# Altium PCB Dev_Brd_ATSAML10D16A_HandMade.PcbDoc
Units mm, origin at the board's own origin, x right, y up, seen from the top; angles counter-clockwise.
Board outline 28 x 40 mm, 2 copper layers (Top Layer, Bottom Layer); 78 components, 47 nets, 211 pads, 70 vias.
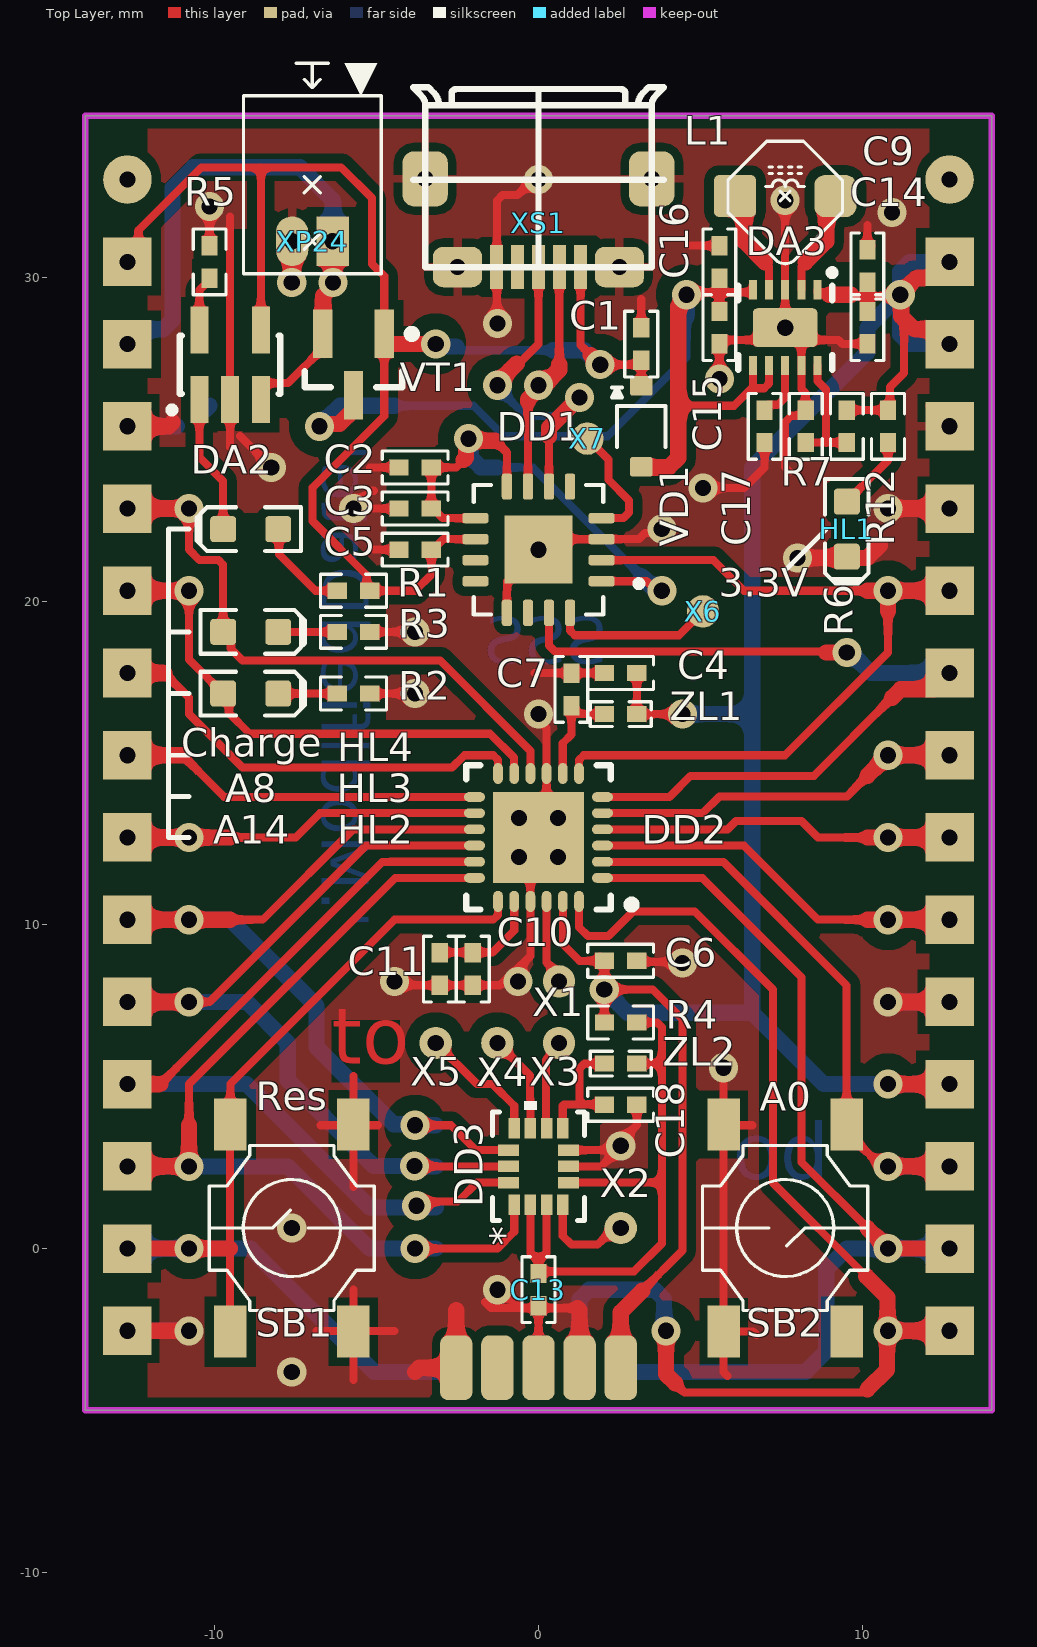
[diagram p0: Top Layer view]
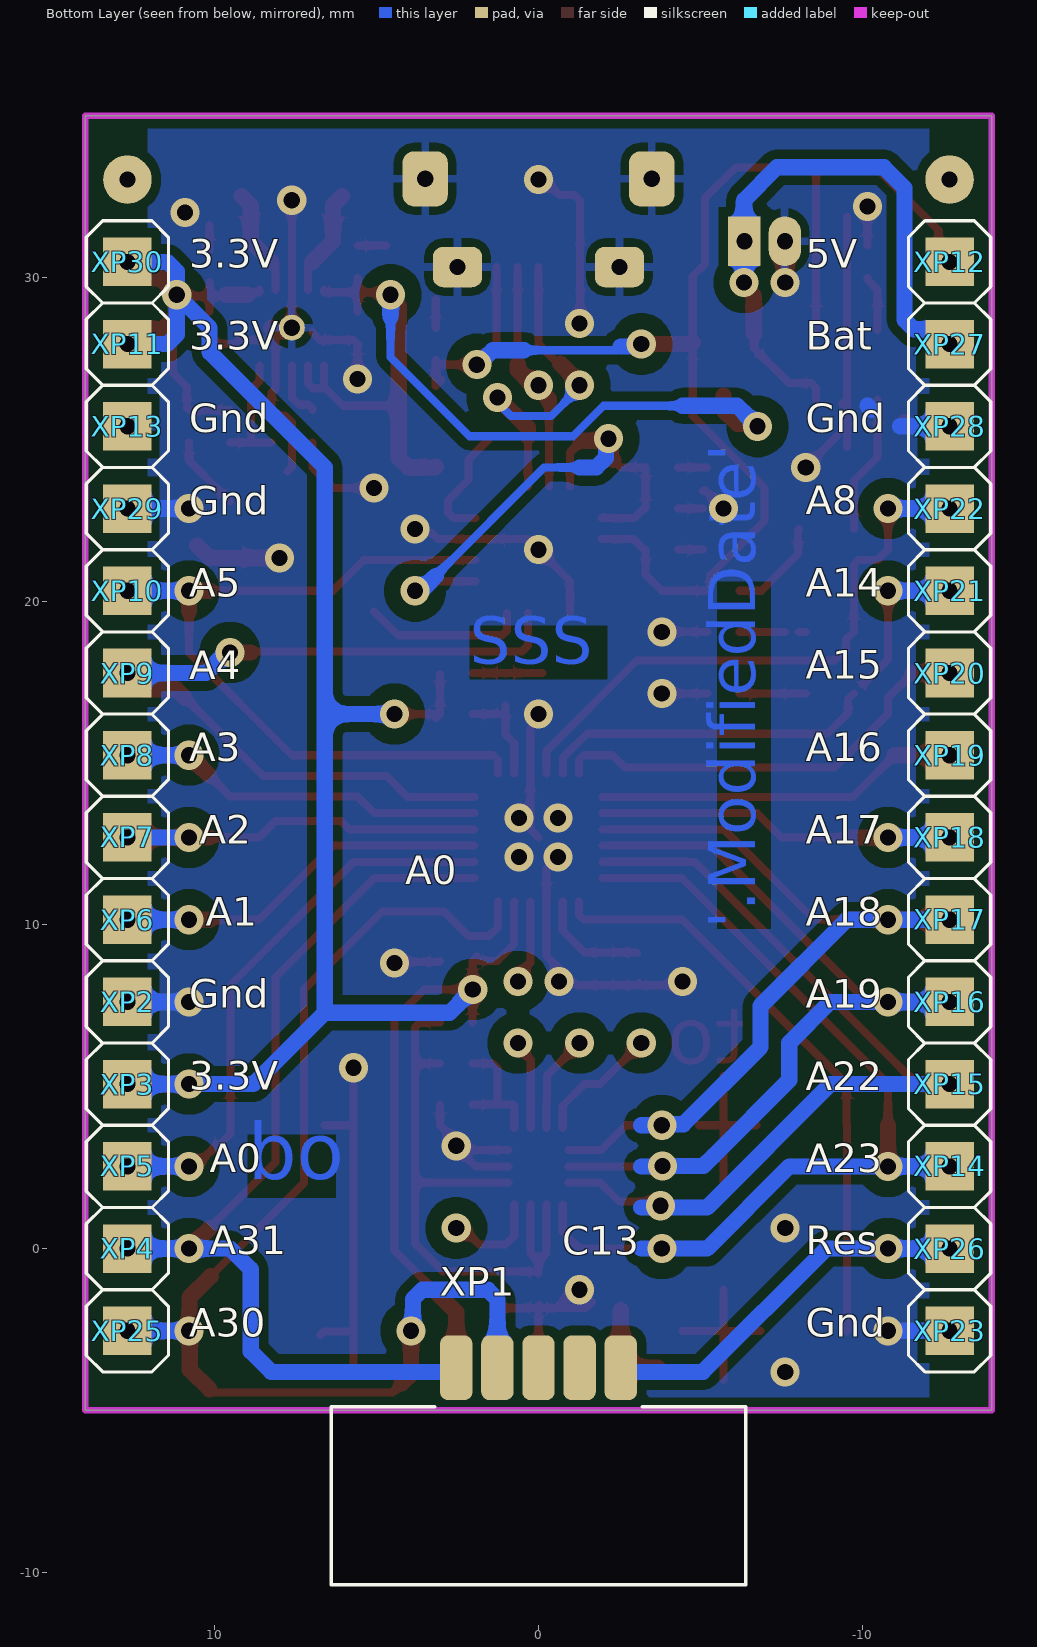
[diagram p1: Bottom Layer view, seen from below]
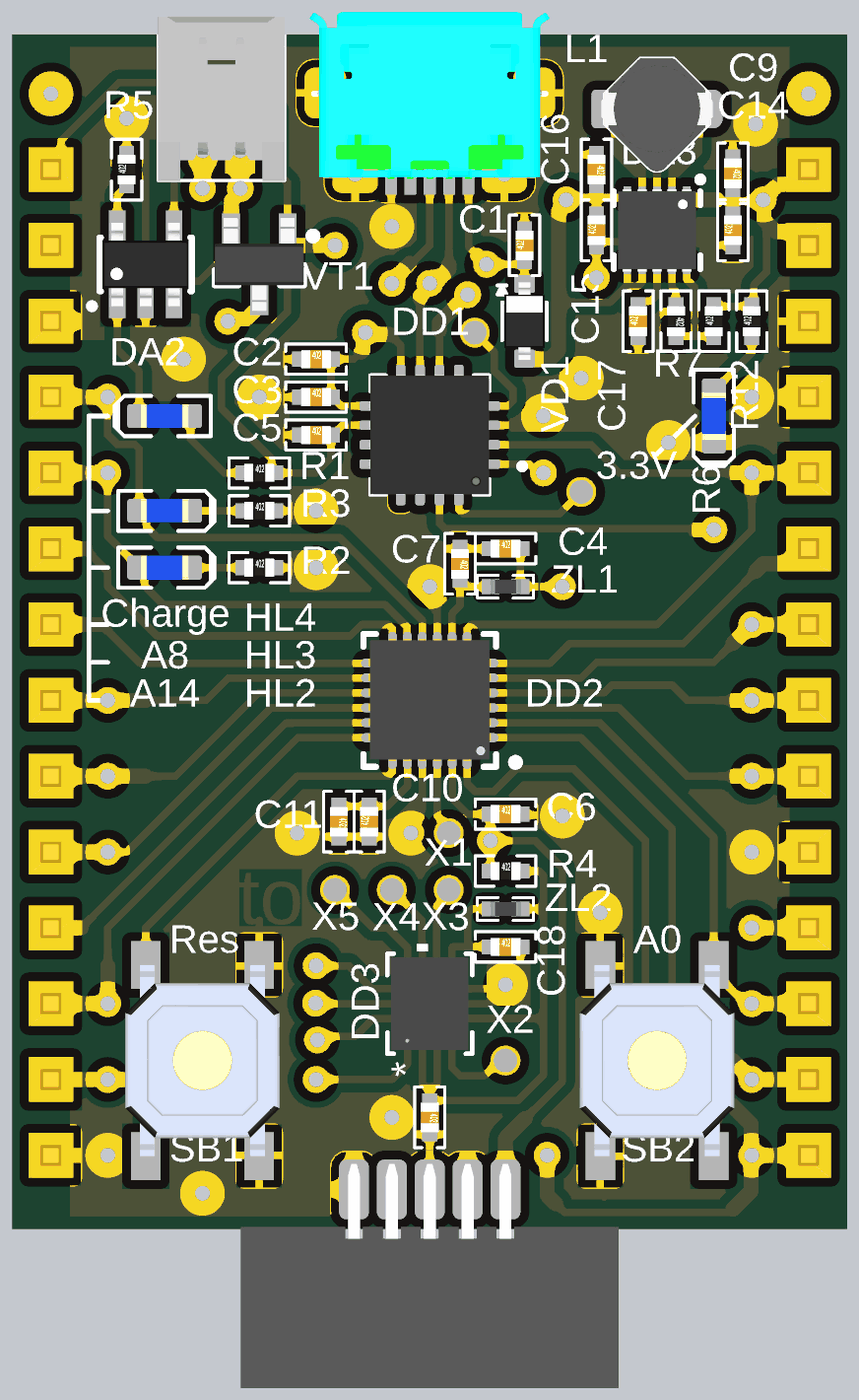
[diagram p2: 3D render of the assembled board from above, using the file's embedded part models]

## Layer stack, top to bottom
Top Solder: solder mask 0.0102, Solder Resist, Dk 3.5
Top Layer: signal copper 0.0356
Dielectric 1: dielectric 0.32, FR-4, Dk 4.8
Bottom Layer: signal copper 0.0356
Bottom Solder: solder mask 0.0102, Solder Resist, Dk 3.5

## Board outline
-14,-5 -14,35 14,35 14,-5

## Design rules (kind name [scope] priority, off if disabled: settings)
Clearance Clearance_InPoly [All vs InPoly] p1: gap=0.3 ignorepadtopadclearanceinfootprint=TRUE except(0: Arc-Text Arc-Hole Track-Text Track-Hole SMDPad-Text SMDPad-Hole THPad-Text THPad-Hole Via-Text Via-Hole Fill-Text Fill-Hole Poly-Text Poly-Hole Region-Text Region-Hole Text-Text Text-Hole; 0.5: Via-Fill Via-Poly Via-Region)
Clearance [All] p2: gap=0.25 ignorepadtopadclearanceinfootprint=TRUE except(0: Arc-Hole Track-Hole SMDPad-Hole THPad-Hole Via-Hole Fill-Hole Poly-Hole Region-Hole Text-Hole)
ComponentClearance ComponentClearance_PLS [(ObjectKind = 'Component') And (Footprint = 'PLS-1-3D')] p1: gap=-1 collisioncheckmode=3 verticalgap=0.254 showdistances=FALSE
ComponentClearance [All] p2: gap=0.254 collisioncheckmode=3 verticalgap=0.254 showdistances=FALSE
PolygonConnect [All] p1: thpad.connectstyle=Relief thpad.reliefconductorwidth=0.254 thpad.reliefentries=4 thpad.polygonreliefangle="90 Angle" thpad.airgapwidth=0.254 smdpad.connectstyle=NoConnect smdpad.reliefconductorwidth=0.254 smdpad.reliefentries=4 smdpad.polygonreliefangle="90 Angle" smdpad.airgapwidth=0.254 via.connectstyle=Direct via.reliefconductorwidth=0.254 via.reliefentries=4 via.polygonreliefangle="90 Angle" via.airgapwidth=0.254
RoutingVias [All] p1: holewidth=0.7 width=1 viastyle="Through Hole" minholewidth=0.5 minwidth=0.9 maxholewidth=1 maxwidth=1.4
SolderMaskExpansion SolderMaskExpansion_IsVia [IsBlindVia] p1: expansion=0.102 istentingtop=TRUE
SolderMaskExpansion [All] p2: expansion=0.3 istentingtop=FALSE
Width [All] p1: maxlimit=0.5 minlimit=0.25 preferedwidth=0.3
29 further rules are at their usual default settings.

## Components (designator, comment, footprint, x,y, rotation, side; value= is the part's Value field where it differs from the comment)
C1 "100n 25V" CapKemet1005(0402) 3.175,27.94 r90 top
C2 "1u 10V" CapKemet1005(0402) -3.81,24.13 r0 top
C3 "100n 16V" CapKemet1005(0402) -3.81,22.86 r0 top
C4 "10u 6.3V 0402" CapKemet1005(0402) 2.54,17.78 r0 top
C5 "100n 16V" CapKemet1005(0402) -3.81,21.59 r0 top
C6 "100n 25V" CapKemet1005(0402) 2.54,8.89 r0 top
C7 "10u 6.3V 0402" CapKemet1005(0402) 1.016,17.272 r270 top
C9 "100n 16V" CapKemet1005(0402) 10.16,30.353 r270 top
C10 "10u 6.3V 0402" CapKemet1005(0402) -2.032,8.636 r90 top
C11 "100n 25V" CapKemet1005(0402) -3.048,8.636 r270 top
C13 "100n 25V" CapKemet1005(0402) 0,-1.27 r270 top
C14 "47uF 6.3V" CapKemet1005(0402) 10.16,28.448 r90 top
C15 "47uF 6.3V" CapKemet1005(0402) 5.588,28.448 r90 top
C16 "100n 16V" CapKemet1005(0402) 5.588,30.48 r270 top
C17 "100n 16V" CapKemet1005(0402) 6.985,25.4 r90 top
C18 "100n 25V" CapKemet1005(0402) 2.54,4.445 r0 top
DA2 "MCP73832T-2DFI/OT" SOT-23-5 -9.525,27.305 r0 top
DA3 "TPS63031DSKT" WSON-10 7.62,28.448 r270 top
DD1 "FT230XQ-R" QFN-16(4x4) 0,21.59 r180 top
DD2 "ATSAML10D16A-MUT" VQFN-24 0,12.7 r180 top
DD3 "LSM6DSMTR" LGA-14L_2P5X3X0P83_STM-M 0,2.54 r90 top
HL1 "Bl 0603" LED-0603-BLUE 9.525,22.225 r270 top
HL2 "Bl 0603" LED-0603-BLUE -8.89,17.145 r0 top
HL3 "Bl 0603" LED-0603-BLUE -8.89,19.05 r0 top
HL4 "Bl 0603" LED-0603-BLUE -8.89,22.225 r180 top
L1 "2.2UH 1.3" CDRH2D11 7.62,32.512 r90 top
R1 "620" "REZKemet 0402" -5.715,20.32 r0 top
R2 "620" "REZKemet 0402" -5.715,17.145 r0 top
R3 "620" "REZKemet 0402" -5.715,19.05 r0 top
R4 "0" "REZKemet 0402" 2.54,6.985 r0 top
R5 "5.1k" "REZKemet 0402" -10.16,30.48 r90 top
R6 "?" "REZKemet 0402" 9.525,25.4 r90 top
R7 "?" "REZKemet 0402" 8.255,25.4 r270 top
R12 "620" "REZKemet 0402" 10.795,25.4 r90 top
SB1 "PTS525SM15SMTR2 LFS" "TACT_SWITCH KPT1187B" -7.62,0.635 r90 top
SB2 "PTS525SM15SMTR2 LFS" "TACT_SWITCH KPT1187B" 7.62,0.635 r270 top
VD1 "1N4148WSTR" SOD323 3.175,25.4 r270 top
VT1 "IRLML6401PbF" SOT23-3N -5.715,27.305 r270 top
X1 "PLLS1.27-1-TOP-R" PLLS1.27-1-TOP-R 0.635,8.255 r90 top
X2 "PLLS1.27-1-TOP-R" PLLS1.27-1-TOP-R 2.54,0.635 r90 top
X3 "PLLS1.27-1-TOP-R" PLLS1.27-1-TOP-R 0.635,6.35 r90 top
X4 "PLLS1.27-1-TOP-R" PLLS1.27-1-TOP-R -1.27,6.35 r90 top
X5 "PLLS1.27-1-TOP-R" PLLS1.27-1-TOP-R -3.175,6.35 r90 top
X6 "PLLS1.27-1-TOP-R" PLLS1.27-1-TOP-R 5.08,19.685 r0 top
X7 "PLLS1.27-1-TOP-R" PLLS1.27-1-TOP-R 1.511,25.019 r0 top
XP1 "3220-10-0100-00 edge" "IPS 10(1.27)edge" 0,-3.683 r180 bottom locked
XP2 "PLS-1" PLS-1-3D 12.7,7.62 r0 bottom
XP3 "PLS-1" PLS-1-3D 12.7,5.08 r0 bottom
XP4 "PLS-1" PLS-1-3D 12.7,0 r0 bottom
XP5 "PLS-1" PLS-1-3D 12.7,2.54 r0 bottom
XP6 "PLS-1" PLS-1-3D 12.7,10.16 r0 bottom
XP7 "PLS-1" PLS-1-3D 12.7,12.7 r0 bottom
XP8 "PLS-1" PLS-1-3D 12.7,15.24 r0 bottom
XP9 "PLS-1" PLS-1-3D 12.7,17.78 r0 bottom
XP10 "PLS-1" PLS-1-3D 12.7,20.32 r0 bottom
XP11 "PLS-1" PLS-1-3D 12.7,27.94 r0 bottom
XP12 "PLS-1" PLS-1-3D -12.7,30.48 r0 bottom
XP13 "PLS-1" PLS-1-3D 12.7,25.4 r0 bottom
XP14 "PLS-1" PLS-1-3D -12.7,2.54 r0 bottom
XP15 "PLS-1" PLS-1-3D -12.7,5.08 r0 bottom
XP16 "PLS-1" PLS-1-3D -12.7,7.62 r0 bottom
XP17 "PLS-1" PLS-1-3D -12.7,10.16 r0 bottom
XP18 "PLS-1" PLS-1-3D -12.7,12.7 r0 bottom
XP19 "PLS-1" PLS-1-3D -12.7,15.24 r0 bottom
XP20 "PLS-1" PLS-1-3D -12.7,17.78 r0 bottom
XP21 "PLS-1" PLS-1-3D -12.7,20.32 r0 bottom
XP22 "PLS-1" PLS-1-3D -12.7,22.86 r0 bottom
XP23 "PLS-1" PLS-1-3D -12.7,-2.54 r0 bottom
XP24 "0530480210" 0530480210 -6.985,31.115 r0 top
XP25 "PLS-1" PLS-1-3D 12.7,-2.54 r0 bottom
XP26 "PLS-1" PLS-1-3D -12.7,0 r0 bottom
XP27 "PLS-1" PLS-1-3D -12.7,27.94 r0 bottom
XP28 "PLS-1" PLS-1-3D -12.7,25.4 r0 bottom
XP29 "PLS-1" PLS-1-3D 12.7,22.86 r90 bottom
XP30 "PLS-1" PLS-1-3D 12.7,30.48 r90 bottom
XS1 "10118194-0001LF" "MICRO_USB _B" 0,33.02 r180 top locked
ZL1 "BLM15PX471SN1D" Ferrite1005(0402) 2.54,16.51 r180 top
ZL2 "470Ohms@100MHz" Ferrite1005(0402) 2.54,5.715 r180 top

## Footprints (in the part's own frame and the unit in brackets; to place one, negate y for a bottom-side part, rotate by r counter-clockwise, add the part's x,y. Pads: shape width x height; smd on the part's side, far side on the other; paste and mask are expansions set on the pad)
0530480210 [mm] "CONN HEADER R/A 2POS 1.25MM"
  rect 1x1.524 hole 0.5: 1(0.625,0)
  oval 1x1.54 hole 0.5: 2(-0.625,0)
  silkscreen extent -2.12,-1 2.12,5.5, body extent -2.12,-1.02 2.12,4.48, height 3.35
CapKemet1005(0402) [mm] "Chip Capacitor, Body 1.0x0.5mm, IPC High Density"
  rect 0.6x0.5 smd: 1(-0.5,0) 2(0.5,0)
  silkscreen extent -1.02,-0.51 1.02,0.51, body extent -0.5,-0.3 0.5,0.3, height 0.2
CDRH2D11 [mm]
  rrect25% 1.3x1.3 smd: 1(0,1.55)
  rrect50% 1.3x1.3 smd: 2(0,-1.55)
  silkscreen extent -2.09,-1.77 1.7,1.77, body extent -2.33,-2.33 2.33,2.33, height 1.1
Ferrite1005(0402) [mm]
  rect 0.6x0.5 smd: 1(-0.5,0) 2(0.5,0)
  silkscreen extent -0.94,-0.38 0.94,0.38, body extent -0.5,-0.25 0.5,0.25, height 0.5
"IPS 10(1.27)edge" [mm]
  rrect50% 1x2 smd: 1(2.54,0) 3(1.27,0) 5(0,0) 7(-1.27,0) 9(-2.54,0)
  rrect50% 1x2 smd far side: 2(2.54,0) 4(1.27,0) 6(0,0) 8(-1.27,0) 10(-2.54,0)
  silkscreen extent -6.4,-6.7 6.4,-1.2, body extent -6.32,-6.65 6.33,0.85, height 2.45
LED-0603-BLUE [mm]
  round 0.254 on Mech15: 0(0,0)
  rrect25% 0.8x0.8 smd: A(-0.85,0) K(0.85,0)
  Top Layer pour cut-out: -0.5,0.5 0.5,0.5 0.5,-0.5 -0.5,-0.5
  silkscreen extent -1.55,-0.67 1.68,0.67, body extent -0.8,-0.4 0.8,0.4, height 0.75
LGA-14L_2P5X3X0P83_STM-M [mil]
  rect 25x14 smd paste+0 mask+0: 1(-46.5,29.53) 2(-46.5,9.84) 3(-46.5,-9.84) 4(-46.5,-29.53) 8(46.5,-29.53) 9(46.5,-9.84) 10(46.5,9.84) 11(46.5,29.53)
  rect 14x25 smd paste+0 mask+0: 5(-19.68,-36.5) 6(0,-36.5) 7(19.68,-36.5) 12(19.68,36.5) 13(0,36.5) 14(-19.68,36.5)
  silkscreen extent -66,-56 79,56, body extent -61,-51 61,51, height 34
"MICRO_USB _B" [mm]
  rect 0.4x1.35 smd: 1(-1.3,2.7) 2(-0.65,2.7) 3(0,2.7) 4(0.65,2.7) 5(1.3,2.7)
  rrect50% 1.4x1.7 hole 0.5: 6(-3.5,-0.025) 6(3.5,-0.025)
  rrect50% 1.524x1.25 hole 0.5: 6(-2.5,2.7) 6(2.5,2.7)
  silkscreen extent -3.88,-2.85 3.88,2.7, body extent -4.02,-2.73 4.02,2.85, height 2.63
PLLS1.27-1-TOP-R [mm]
  round 1 smd paste-0.1: 1(0,0)
PLS-1-3D [mm] "Connector; Header; 1 Position"
  rect 1.5x1.5 hole 0.5: 1(0,0)
  silkscreen extent -1.27,-1.27 1.27,1.27, body extent -1.27,-1.27 1.27,1.27, height 8.44
QFN-16(4x4) [mm]
  rrect50% 0.81x0.32 smd: 1(-1.95,0.975) 2(-1.95,0.325) 3(-1.95,-0.325) 4(-1.95,-0.975) 9(1.95,-0.975) 10(1.95,-0.325) 11(1.95,0.325) 12(1.95,0.975)
  rrect50% 0.32x0.81 smd: 5(-0.975,-1.95) 6(-0.325,-1.95) 7(0.325,-1.95) 8(0.975,-1.95) 13(0.975,1.95) 14(0.325,1.95) 15(-0.325,1.95) 16(-0.975,1.95)
  rect 2.1x2.1 smd paste-2: 17(0,0)
  silkscreen extent -3.2,-2 2,2, body extent -2,-2 2,2, height 0.92
"REZKemet 0402" [mm] "Chip Capacitor, Body 1.0x0.5mm, IPC High Density"
  rect 0.6x0.5 smd: 1(-0.5,0) 2(0.5,0)
  silkscreen extent -1.02,-0.51 1.02,0.51, body extent -0.5,-0.3 0.5,0.3, height 0.2
SOD323 [mm] "SOD-323; 2 Leads; Body 1.8 x 1.35 mm, (LxW)"
  round 0.508 on Mech15: 0(0,0)
  rrect25% 0.6x0.7 smd: 1(-1.25,0) 2(1.25,0)
  silkscreen extent -1.2,-0.9 0.64,0.75, body extent -1.3,-0.68 1.3,0.67, height 1.1
SOT23-3N [mm] "SOT23, 3-Leads, Body 2.9x1.3mm, Pitch 0.95mm, Lead Span 2.5mm, IPC Medium Density"
  rect 1.5x0.6 smd: 1(-0.95,0.95) 2(-0.95,-0.95) 3(0.95,0)
  silkscreen extent -1.07,-1.5 0.7,1.93, body extent -1.57,-1.5 1.57,1.5, height 1
SOT-23-5 [mm] "SOT-23/SC-74A; 5 Leads; Body 3 x 3.1 mm, inc. leads (LxW max)"
  rect 0.55x1.45 smd: 1(-0.95,-1.075) 2(0,-1.075) 3(0.95,-1.075) 4(0.95,1.075) 5(-0.95,1.075)
  silkscreen extent -1.9,-1.5 1.55,0.9, body extent -1.45,-1.4 1.45,1.4, height 1.45
"TACT_SWITCH KPT1187B" [mm] "SMD_Button 5.2x5.2x1.6"
  rect 1.6x1 smd: 1(-3.2,1.9) 1(3.2,1.9) 2(-3.2,-1.9) 2(3.2,-1.9)
  silkscreen extent -2.55,-2.55 2.55,2.55, body extent -3.2,-2.6 3.2,2.6, height 1.5
VQFN-24 [mm] "QFN, 24-Leads, Body 4x4mm, Pitch 0.5mm, IPC High Density"
  oval 0.65x0.3 smd: 1(-1.975,1.25) 2(-1.975,0.75) 3(-1.975,0.25) 4(-1.975,-0.25) 5(-1.975,-0.75) 6(-1.975,-1.25) 13(1.975,-1.25) 14(1.975,-0.75) 15(1.975,-0.25) 16(1.975,0.25) 17(1.975,0.75) 18(1.975,1.25)
  oval 0.3x0.65 smd: 7(-1.25,-1.975) 8(-0.75,-1.975) 9(-0.25,-1.975) 10(0.25,-1.975) 11(0.75,-1.975) 12(1.25,-1.975) 19(1.25,1.975) 20(0.75,1.975) 21(0.25,1.975) 22(-0.25,1.975) 23(-0.75,1.975) 24(-1.25,1.975)
  rect 2.8x2.8 smd: 25(0,0)
  silkscreen extent -3,-2.22 2.22,2.22, body extent -2.05,-2.07 2.05,2.03, height 1
WSON-10 [mm] "SON, 10-Leads, Body 2,50x2,50mm,"
  rect 0.6x0.25 smd: 1(-1.17,1) 2(-1.17,0.5) 3(-1.17,0) 4(-1.17,-0.5) 5(-1.17,-1) 6(1.17,-1) 7(1.17,-0.5) 8(1.17,0) 9(1.17,0.5) 10(1.17,1)
  rrect25% 1.2x2 smd: 11(0,0)
  round 0.8 hole 0.5: 11(0,0)
  silkscreen extent -1.8,-1.45 1.3,1.55, body extent -1.38,-1.3 1.38,1.3, height 0.8

## Part data
C1 C6 C11: library part CAPC1608(0603), "CAP CER 0.1UF 25V X5R 0402", Digi-Key Part Number=732-7495-1-ND, Manufacturer Part Number=885012105018, Code_JEDEC=0402, HelpURL=https://www.digikey.com/product-detail/en/wurth-electronics-inc/885012105018/732-7495-1-ND/5454122, Part Number=CAPC1608(0603), Price$=0.11
C2: library part CAPC1005(0402)N, "CAP CER 1UF 10V 10% X6S 0402", Manufacturer Part Number=LMK105BJ105KPLF, Mouser Part Number=963-LMK105BJ105KPLF, Package=0402, HelpURL=https://eu.mouser.com/ProductDetail/Taiyo-Yuden/LMK105BJ105KPLF?qs=sGAEpiMZZMs0AnBnWHyRQIHQ3Mw87cdo1QzgwSlYWOQcjHYBR0FFrA%3D%3D, Part Number=CAPC1005(0402)N, Price$=0.11
C3 C5 C9 C16 C17: library part CL05F104ZO5NNNC, "Cap Cer 0.1uF 16V 1% C0G(NP0) MLCC", Digi-Key Part Number=1276-1004-1-ND, Package=0402, HelpURL=https://www.digikey.com/product-detail/en/CL05F104ZO5NNNC/1276-1004-1-ND/3889090/?itemSeq=332907103, Manufacturer Part Number=CL05F104ZO5NNNC, Part Number=CL05F104ZO5NNNC, Price$=0.00475
C4 C7 C10: library part CAPC1608(0603), "CAP CER 10UF 6.3V X5R 0402", Digi-Key Part Number=GRJ155R60J106ME11D, Code_JEDEC=0402, HelpURL=https://www.digikey.com/product-detail/en/murata-electronics-north-america/GRJ155R60J106ME11D/490-13211-1-ND/5877419, Manufacturer Part Number=GRJ155R60J106ME11D, Part Number=CAPC1608(0603), Price$=0.22
C13 C18: library part CL05B104KA5NNNC, "CAP CER 0.1UF 25V X7R 0402", Digi-Key Part Number=1276-6720-1-ND, Package=0402, HelpURL=https://www.digikey.com/en/products/detail/samsung-electro-mechanics/CL05B104KA5NNNC/5961204, Manufacturer Part Number=CL05B104KA5NNNC, Part Number=CL05B104KA5NNNC, Price$=0.00487
C14 C15: library part GRM188R60J476ME15D, "CAP CER 47UF 6.3V X5R 0603", Digi-Key Part Number=490-13247-1-ND, Package=0603, HelpURL=https://www.digikey.com/en/products/detail/murata-electronics/GRM188R60J476ME15D/5877410, Manufacturer Part Number=GRM188R60J476ME15D, Part Number=GRM188R60J476ME15D, Price$=0.16924
DA2: "IC LI-ION/LI-POLY CTRLR SOT23-5", Digi-Key Part Number=MCP73832T-2DFI/OTCT-ND, HelpURL=https://www.digikey.com/product-detail/en/MCP73832T-2DFI%2fOT/MCP73832T-2DFI%2fOTCT-ND/2060344/?itemSeq=274027917, Part Number=MCP73832T-2DFI/OT
DA3: "IC REG BCK BST 3.3V 900MA 10SON", Digi-Key Part Number=296-23904-1-ND, HelpURL=https://www.digikey.com/en/products/detail/texas-instruments/TPS63031DSKT/1967863, Manufacturer Part Number=TPS63031DSKT, Part Number=TPS63031DSKT, Price$=2,28
DD1: "IC USB SERIAL BASIC UART 16QFN", Digi-Key Part Number=768-1130-1-ND, HelpURL=https://www.digikey.com/en/products/detail/ftdi-future-technology-devices-international-ltd/FT230XQ-R/3029142, Manufacturer Part Number=FT230XQ-R, Part Number=FT230XQ-R, Price$=2,04
DD2: "IC MCU 32BIT 64KB FLASH 24VQFN,ARM® Cortex®-M23", Digi-Key Part Number=ATSAML10D16A-MUTCT-ND, Code_JEDEC=VQFN-24, HelpURL=https://www.digikey.com/product-detail/en/microchip-technology/ATSAML10D16A-MUT/ATSAML10D16A-MUTCT-ND/9360576, Manufacturer Part Number=ATSAML10D16A-MUT, Part Number=ATSAML10D16A-MUT, Price$=1.82
DD3: "IMU ACCEL/GYRO I2C/SPI 14LGA", Digi-Key Part Number=497-16696-1-ND, Mouser Part Number=511-LSM6DSMTR, Built_By=EMA_Cory, Copyright="Copyright (C) 2018 Accelerated Designs. All rights reserved", Datasheet=https://www.st.com/content/ccc/resource/technical/document/datasheet/76/27/cf/88/c5/03/42/6b/DM00218116.pdf/files/DM00218116.pdf/jcr:content/translations/en.DM00218116.pdf, HelpURL=https://eu.mouser.com/ProductDetail/STMicroelectronics/LSM6DSMTR?qs=dTJS0cRn7ogKkf7uVmbVmg%3D%3D, HelpURL2=#https://www.digikey.com/product-detail/en/stmicroelectronics/LSM6DSMTR/497-16696-1-ND/6192778#, Manufacturer Part Number=LSM6DSMTR, Manufacturer_Part_Number=LSM6DSMTR, Part Number=LSM6DSMTR, Price$=2.92, RefDes=RefDes, SourceLibrary=Updates_to_database_2020-11-03, Type=DEV, Vendor=STMicroelectronics
HL1 HL2 HL3 HL4: library part 150060BS55040, "LED BLUE DIFFUSED 0603 SMD", Digi-Key Part Number=732-12013-1-ND, Package=0603, HelpURL=https://www.digikey.com/products/en?keywords=732-12013-1-ND, Manufacturer Part Number=150060BS55040, Part Number=150060BS55040
L1: library part CDRH2D11/HPNP-2R2NC, "FIXED IND 2.2UH 1.3A 120 MOHM", Digi-Key Part Number=308-1578-1-ND, HelpURL=https://www.digikey.com/product-detail/en/sumida-america-components-inc/CDRH2D11-HPNP-2R2NC/308-1578-1-ND/2620850, LatestRevisionDate=17-Jul-2002, LatestRevisionNote="Re-released for DXP Platform.", Manufacturer Part Number=CDRH2D11/HPNP-2R2NC, PackageDescription="Axial Device, Thru-Hole; 2 Leads; 0.9 in Pin Spacing", PackageReference=AXIAL-0.9, Part Number=CDRH2D11/HPNP-2R2NC, Price$=0.69, Published=24-Mar-1999, Publisher="Altium Limited"
R1 R2 R3 R6 R7 R12: library part RESC1005(0402), Package=0402, Part Number=RESC1005(0402)
R4: library part RMCF0402ZT0R00, "RES SMD 0402 0 Ohm", Mouser Part Number=RMCF0402ZT0R00CT-ND, Package=0402, HelpURL=https://www.digikey.com/en/products/detail/stackpole-electronics-inc/RMCF0402ZT0R00/1756905, Manufacturer Part Number=RMCF0402ZT0R00, Part Number=RMCF0402ZT0R00, Price$=0.00186
R5: library part RESC1005(0402), "RES SMD 5.1K OHM 1% 1/10W 0402", Manufacturer Part Number=ERJ-2RKF5101X, Mouser Part Number=755-SFR01MZPF5101, Package=0402, HelpURL=https://eu.mouser.com/ProductDetail/ROHM-Semiconductor/SFR01MZPF5101?qs=sGAEpiMZZMvdGkrng054t7z4BkURc4Lz8VVRSaz2ejIiXEQeYNXBXw%3D%3D, Part Number=RESC1005(0402), Price$=0.1
SB1 SB2: "SWITCH TACTILE SPST-NO 0.02A 15V", Digi-Key Part Number=CKN9104CT-ND, HelpURL=https://www.digikey.com/products/en?keywords=CKN9104CT-ND, Manufacturer Part Number="PTS525SM15SMTR2 LFS", Part Number="PTS525SM15SMTR2 LFS", Price$=0.33
VD1: "DIODE GEN PURP 75V 300MA SOD323", Digi-Key Part Number=1655-1359-1-ND, Manufacturer Part Number=?, Code_JEDEC=DO-204-AH, ComponentLink1Description="Manufacturer Link", ComponentLink1URL=http://www.fairchildsemi.com/, ComponentLink2Description=Datasheet, ComponentLink2URL=http://www.fairchildsemi.com/ds/1N%2F1N4148.pdf, DatasheetVersion=1997, HelpURL=https://www.digikey.com/product-detail/en/smc-diode-solutions/1N4148WSTR/1655-1359-1-ND/6022804, LatestRevisionDate=17-Jul-2002, LatestRevisionNote="Re-released for DXP Platform.", Note=?, Package=?, PackageDescription="Diode, Axial; Body 3.8 x 1.9 mm (LxDia. max), Lead Dia. 0.53 mm (max)", PackageReference=DO-35, Part Number=1N4148WSTR, Price$=?, Published=8-Jun-2000, Publisher="Altium Limited"
VT1: Digi-Key Part Number=???, HelpURL=https://www.infineon.com/dgdl/irlml6401pbf.pdf?fileId=5546d462533600a401535668b96d2634, Manufacturer Part Number=???, Note=???, Package=???, Part Number=IRLML6401PbF, Price$=???
XP1: "3220-10-0100-00", Digi-Key Part Number=1175-1627-ND, Package="Header 20POS 1.27mm", HelpURL=https://www.digikey.com/product-detail/en/cnc-tech/3220-10-0100-00/1175-1627-ND/3883661, Part Number="3220-10-0100-00 edge"
XP2 XP3 XP4 XP5 XP6 XP7 XP8 XP9 XP10 XP11 XP12 XP13 XP14 XP15 XP16 XP17 XP18 XP19 XP20 XP21 XP22 XP23 XP25 XP26 XP27 XP28 XP29 XP30: "CONN HEADER VERT 1POS", Digi-Key Part Number=S1011EC-01-ND, Manufacturer Part Number=PRPC001SAAN-RC, HelpURL=https://www.digikey.com/product-detail/en/sullins-connector-solutions/PRPC001SAAN-RC/S1011EC-01-ND/2775253, Part Number=PLS-1, Price$=0.05
XP24: "CONN HEADER R/A 2POS 1.25MM", Digi-Key Part Number=WM1742-ND, HelpURL=https://www.digikey.com/product-detail/en/molex/0530480210/WM1742-ND/242864, Manufacturer Part Number=0530480210, Part Number=0530480210, Price$=0.3
XS1: "USB Connectors 5P MICRO USB TYPE B RCPT W/ REAR PEGS", Digi-Key Part Number=609-4618-1-ND, Mouser Part Number=649-10118194-0001LF, HelpURL=https://eu.mouser.com/ProductDetail/Amphenol-FCI/10118194-0001LF?qs=%2Fha2pyFadugHQYubHEjQrWaf71KglMlHbfZ%2FBmSxIoqAM0lAnkBayw%3D%3D, Manufacturer Part Number=10118194-0001LF, Part Number=10118194-0001LF, Price$=0.265
ZL1: library part Ferrite1005(0402), "FERRITE BEAD 470 OHM 0402 1LN", Digi-Key Part Number=490-10662-1-ND, Code_JEDEC=0402, Manufacturer Part Number=BLM15PX471SN1D, Part Number=Ferrite1005(0402), Price$=0.15
ZL2: library part Ferrite1005(0402), "FERRITE BEAD 470 OHM 0402 1LN", Manufacturer Part Number=BLM15PX471SN1D, Package=0402, HelpURL=https://eu.mouser.com/ProductDetail/Murata-Electronics/BLM15PX471SN1D?qs=%2Fha2pyFadugFXr5biOyskwIVnWnam4MScgU55pluOIVbLGfRcJswjw%3D%3D, Mouser Part Number=BLM15PX471SN1D, Part Number=Ferrite1005(0402), Price$=0.14
X1 X2 X3 X4 X5 X6 X7: Part Number=PLLS1.27-1-TOP-R

## Free pads (board coordinates)
  round 1.5 hole 0.5 unplated: 0(-12.7,33.02) 0(12.7,33.02)

## Via types
v1: diameter 0.9, hole 0.5, Top Layer to Bottom Layer, 70 vias

## Nets (pads, with @x,y where several pads share a name; then routed paths per layer and width w, separated by ;. In a path a pad name is that pad's centre, name@x,y a point inside that pad or via, vN(x,y) a via of type N, cw(c..) or ccw(c..) an arc to the next point about the centre after c; other vN are vias at no path point)
3,3V: C4.2 C6.1 C9.2 C14.2 DA3.1 DD2.23 R4.1 R6.2 R12.2 XP1.10 XP3.1 XP11.1 XP30.1 ZL1.1 | length 80.8
  Top Layer w0.25: DD2.23 0.76,10.715 0.76,9.4 1.27,8.89 C6.1 C6.1@1.905,9.025 ; C6.1@1.998,8.882 2.036,8.844 2.036,8.005 v1(2.032,8.001) ; R4.1 2.036,6.989 2.036,7.997 v1(2.032,8.001) ; C4.2@3.04,17.734 ZL1.1 3.165,16.385 3.215,16.435 3.215,16.51 v1(4.445,16.51) v1@4.462,16.51 ; 3.206,-1.301 4.445,-0.063 4.445,7.087 3.531,8.001 v1(2.032,8.001) ; DA3.1 8.62,29.531 8.912,29.531 ; R6.2 R12.2 10.863,25.968 10.863,26.611 11.295,27.043 11.295,28.71 ; 9.652,29.464 9.698,29.418 10.16,29.418 ; C14.2 10.16,29.418 ; C9.2 10.16,29.418 ; v1@11.207,29.433 v1(11.176,29.464) 11.13,29.418 10.16,29.418
  Top Layer w0.5: XP1.10 2.54,-1.968 3.206,-1.301 ; 8.979,29.464 9.652,29.464 ; v1(10.795,5.08) XP3.1 ; v1(11.176,29.464) 11.176,29.487 11.669,29.98 12.2,29.98 XP30.1 ; v1@11.207,29.433 11.207,28.798 11.295,28.71 11.602,28.403 12.237,28.403 XP11.1
  Bottom Layer w0.5: v1(2.032,8.001) 2.745,7.288 6.604,7.288 ; v1(4.445,16.51) 6.604,16.51 ; 11.176,30.187 v1(11.176,29.464) ; 11.253,30.264 11.469,30.48 XP30.1 XP30.1@12.2,29.98 ; XP11.1@12.294,28.346 XP11.1 11.469,27.94 11.176,28.233 v1(11.176,29.464) ; XP3.1 v1(10.795,5.08) 8.812,5.08 6.604,7.288 ; 6.604,7.288 6.604,16.51 ; 6.604,16.51 6.604,24.13 10.16,27.686 10.16,28.448 v1(11.176,29.464)
+5V: C1.1 C5.2 DA2.4 DD1.10 R1.2 VD1.1 VT1.1 XP12.1 XS1.1 | length 45.9
  Top Layer w0.25: XP12.1 -12.356,30.824 -12.356,31.459 -10.414,33.401 -8.575,33.401 ; DA2.4 -8.575,33.401 ; DD1.10 -2.935,21.915 -3.26,21.59 C5.2 -3.31,20.82 -3.81,20.32 R1.2 -5.305,20.41 -5.305,20.799 -6.985,22.479 -6.985,23.505 -4.765,25.725 -4.765,27.99 VT1.1 -4.765,30.038 -5.143,30.416 -5.143,32.448 -6.096,33.401 -8.575,33.401 ; XS1.1 1.3,27.91 v1(1.905,27.305) 3.05,27.305 C1.1@3.175,27.43 ; VD1.1@3,26.825 VD1.1 ; VD1.1@3.175,26.67 C1.1@3.175,27.43 ; C1.1 C1.1@3.175,27.43
  Top Layer w0.5: VT1.1@-4.765,27.99 -4.715,27.94 v1(-3.175,27.94) ; v1@1.603,27.608 v1(1.905,27.305)
  Bottom Layer w0.25: v1(-3.175,27.94) v1@-3.065,27.83 ; -2.54,27.866 -2.424,27.75 0.445,27.75
  Bottom Layer w0.5: v1@-3.065,27.83 -3.065,27.866 -2.54,27.866 ; 0.445,27.75 1.412,27.75 1.857,27.305 v1(1.905,27.305)
But: DD2.2 SB2.1 XP5.1 | length 21.1
  Top Layer w0.25: DD2.2 1.985,11.94 5.715,11.94 ; 5.715,11.938 9.52,8.133 9.52,3.835 9.52,3.535 9.895,3.16 9.968,3.16 10.588,2.54 XP5.1
  Top Layer w0.5: v1(10.795,2.54) XP5.1
  Bottom Layer w0.5: v1(10.795,2.54) XP5.1
GND: C1.2 C2.1 C3.1 C4.1 C5.1 C6.2 C7.1 C9.1 C10.1 C11.2 C13.2 C14.1 C15.1 C16.1 C17.1 C18.2 DA2.2 DA3.3 DA3.9 DA3.11 DD1.3 DD1.13 DD1.17 DD2.9 DD2.21 DD2.25 DD3.6 DD3.7 HL1.K R2.2 R3.2 R5.2 R7.1 SB1.2 SB2.2 XP1.2 XP1.6 XP1.8 XP2.1 XP13.1 XP23.1 XP24.2 XP28.1 XP29.1 XS1.5 XS1.6 | length 121.1
  Top Layer w0.25: R5.2 v1(-10.16,32.195) ; -9.525,24.765 DA2.2 ; -9.525,31.877 DA2.2 ; DA2.2@-9.381,26.086 DA2.2 ; -9.225,25.1 v1(-8.255,24.13) ; -6.858,-2.54 SB1.2@-5.72,-2.54 ; -6.731,3.81 SB1.2@-5.72,3.81 ; -5.715,-4.064 -5.72,-4.059 -5.72,-2.565 SB1.2@-5.72,-2.54 ; -5.715,-1.27 -5.72,-1.275 SB1.2@-5.72,-2.54 ; -5.715,1.905 -5.72,1.91 SB1.2@-5.72,3.81 ; -5.715,5.334 -5.72,5.329 -5.72,3.835 SB1.2@-5.72,3.81 ; v1@-5.63,22.86 v1(-5.715,22.86) -5.164,23.411 -5.079,23.411 ; R2.2 v1(-3.81,17.145) ; R3.2 v1(-3.81,19.05) ; -5.207,24.13 C2.1 ; -5.08,21.59 C5.1 ; -5.08,22.86 C3.1 ; -4.953,3.81 SB1.2@-5.72,3.81 ; v1@-4.564,8.136 C11.2 ; -4.445,-2.54 SB1.2@-5.72,-2.54 ; v1(-4.445,8.255) v1@-4.386,8.196 ; C11.2@-3.107,8.196 C11.2 ; -1.651,-1.651 -1.465,-1.837 C13.2@0,-1.837 ; v1(-1.27,-1.27) -1.094,-1.27 -0.625,-1.739 ; v1(-1.27,28.575) -1.285,28.59 -1.285,32.37 -1.108,32.547 -0.649,32.547 -0.176,33.02 v1(0,33.02) ; DD1.13 -0.975,20.615 v1(0,21.59) 0.325,21.915 DD1.3 3.1,21.915 3.286,22.101 3.686,22.101 v1(3.81,22.225) ; v1(-0.635,8.255) v1@-0.762,8.382 ; v1(-0.6,12.1) -0.25,11.75 DD2.21 -0.25,9.037 -0.762,8.525 v1@-0.762,8.382 ; -0.127,17.78 C7.1@1.016,17.78 ; C13.2@-0.031,-1.739 C13.2 ; XP1.6@0,-3.175 C13.2@0,-1.837 ; DD2.25 0.25,12.95 0.25,16.084 0,16.334 v1(0,16.51) ; DD3.6 1.937,2.54 2.54,3.143 v1(2.54,3.175) 2.54,3.32 3.04,3.82 C18.2 ; DD3.7 v1@2.405,3.04 ; C7.1 C7.1@1.016,17.78 ; 1.202,-1.837 C13.2@0.067,-1.837 ; C4.1 C7.1@1.016,17.78 ; C6.2 3.072,8.859 4.413,8.859 v1(4.445,8.827) ; C1.2 3.175,29.337 ; 4.699,30.988 4.707,30.98 C16.1 C16.1@5.58,30.988 ; v1(5.08,23.495) 6.35,23.495 6.985,24.13 C17.1 ; C15.1@5.569,27.929 5.707,28.067 6.747,28.067 6.985,28.305 DA3.11@6.985,28.321 ; v1(5.588,26.86) C15.1 ; SB2.2@5.715,3.81 5.715,-2.921 SB2.2@5.72,-2.916 ; SB2.2@5.715,3.835 v1@5.715,5.207 ; 5.842,-3.937 5.72,-3.815 SB2.2@5.72,-2.916 ; SB2.2@5.842,3.81 6.604,3.81 ; 6.731,-2.667 6.629,-2.565 5.72,-2.565 SB2.2@5.72,-2.916 ; DA3.11@7.62,28.448 DA3.3 v1(7.62,32.385) ; 7.747,24.003 7.61,24.14 7.61,25.527 7.808,25.725 8.13,25.725 8.255,25.85 R7.1 ; DA3.11@8.145,28.338 8.178,28.304 8.415,28.067 9.271,28.067 9.39,27.948 C14.1 C14.1@10.16,27.898 ; R7.1@8.255,26.035 R7.1 ; DA3.11@8.255,28.448 8.255,28.38 8.12,28.245 DA3.9 8.12,26.551 8.242,26.429 8.242,25.913 R7.1 ; 10.16,31.623 C9.1 C9.1@10.283,30.976 ; XP13.1@12.075,26.025 XP13.1 ; C11.2 C10.1 -1.184,8.136 -0.938,8.382 v1@-0.762,8.382 ; C13.2@0,-1.837 C13.2 ; C13.2@0,-1.837 C13.2@0.067,-1.837 ; C13.2 C13.2@0.067,-1.837
  Top Layer w0.5: XP23.1 v1(-10.795,-2.54) ; XP28.1 -11.43,25.4 -11.303,25.527 ; v1(-7.62,29.845) -7.615,29.85 -7.615,31.11 XP24.2 ; -3.81,-3.81 -3.683,-3.683 XP1.2 -2.54,-1.905 ; XS1.6@-2.286,30.226 XS1.6@-2.192,30.32 ; 1.202,-1.837 1.27,-1.905 XP1.8 ; DA3.11@7.62,28.448 7.73,28.338 8.145,28.338 DA3.11@8.255,28.448 ; v1@8.382,21.336 10.16,21.336 10.541,21.717 ; v1(10.795,7.62) XP2.1 ; v1(10.795,22.86) XP29.1
  Bottom Layer w0.5: XP23.1 v1(-10.795,-2.54) ; XP28.1@-12.2,25.9 XP28.1 -11.176,25.4 ; -10.295,25.9 -10.16,26.035 ; v1(10.795,7.62) XP2.1 ; v1(10.795,22.86) XP29.1
  other v1: -7.62,-3.81 -7.62,0.635 5.715,5.588 0.6,12.1 -0.6,13.3 0.6,13.3 8.001,21.336 10.922,32.004
LED_BLUE: DD2.11 HL2.A XP21.1 | length 17.6
  Top Layer w0.25: v1(-10.795,20.32) -10.795,18.2 HL2.A@-10.015,17.42 ; HL2.A -9.564,16.969 -9.564,16.549 -8.918,15.903 -1.494,15.903 -0.76,15.168 -0.76,14.685 DD2.11
  Top Layer w0.5: XP21.1 v1(-10.795,20.32)
  Bottom Layer w0.5: XP21.1 v1(-10.795,20.32)
LED_GREEN: DD2.10 HL3.A XP22.1 | length 20.3
  Top Layer w0.25: v1(-10.795,22.86) -10.795,21.59 -10.477,21.273 -9.886,21.273 -9.74,21.126 HL3.A -9.501,18.811 -9.501,18.518 -9.144,18.161 -3.036,18.161 -0.25,15.375 DD2.10
  Top Layer w0.5: XP22.1 v1(-10.795,22.86)
  Bottom Layer w0.5: XP22.1 v1(-10.795,22.86)
MCU_RX: DD1.15 DD2.6 XP9.1 | length 26
  Top Layer w0.25: DD1.15 0.325,18.628 0.506,18.447 8.858,18.447 8.89,18.415 ; DD2.6 4.044,13.95 4.699,14.605 8.509,14.605 10.922,17.018
  Top Layer w0.5: 8.89,18.415 v1(9.525,18.415) ; 10.922,17.018 11.184,17.28 12.2,17.28 XP9.1
  Bottom Layer w0.5: v1(9.525,18.415) 9.633,18.415 10.268,17.78 XP9.1
MCU_TX: DD1.2 DD2.7 XP10.1 | length 26.3
  Top Layer w0.25: DD2.7 1.25,15.094 1.396,15.24 7.62,15.24 10.795,18.415 10.795,19.685 ; DD1.2 5.405,21.265 6.35,20.32 10.16,20.32
  Top Layer w0.5: 10.16,20.32 v1(10.795,20.32) ; 10.795,19.685 v1(10.795,20.32) ; XP10.1 v1(10.795,20.32)
  Bottom Layer w0.5: v1(10.795,20.32) XP10.1
NetC2_2: C2.2 C3.2 DD1.1 DD1.8 DD1.9 | length 17.3
  Top Layer w0.25: C3.2 C3.2@-3.31,22.91 ; C2.2@-3.297,24.143 C2.2 ; -2.312,24.358 -2.388,24.282 -2.54,24.13 C2.2 ; v1(-2.159,25.019) v1@-2.096,24.956 ; DD1.9@-1.999,22.6 DD1.9@-1.964,22.565 ; DD1.9 DD1.9@-1.964,22.565 ; -1.334,24.956 -0.975,24.597 DD1.8 ; DD1.1 3.339,20.615 3.634,20.32 v1(3.81,20.32) ; C3.2@-3.31,22.91 -2.965,22.565 DD1.9@-1.964,22.565 ; C3.2@-3.31,22.91 C2.2
  Top Layer w0.5: -2.312,24.358 -2.236,24.434 -2.236,24.942 v1(-2.159,25.019) ; v1@-2.096,24.956 -1.334,24.956
  Bottom Layer w0.25: v1(-2.159,25.019) v1@-2.082,24.942 ; -1.27,24.13 -0.175,24.13 3.175,20.78 ; v1@3.635,20.32 v1(3.81,20.32)
  Bottom Layer w0.5: v1@-2.082,24.942 -2.082,24.423 -1.79,24.13 -1.27,24.13 ; 3.175,20.78 3.435,20.52 3.502,20.52 3.635,20.387 v1@3.635,20.32
NetC7_2: C7.2 DD2.8 ZL1.2 | length 3.2
  Top Layer w0.25: DD2.8 0.75,15.609 1.016,15.875 C7.2 ; C7.2@1.058,16.51 ZL1.2
NetC10_2: C10.2 C11.1 DD2.20 | length 3.5
  Top Layer w0.25: C11.1 -3.032,9.152 -1.42,9.152 -0.75,9.821 DD2.20
NetC13_1: C13.1 DD3.2 DD3.3 DD3.5 R4.2 ZL2.1 | length 19.5
  Top Layer w0.25: DD3.2 -0.25,-0.131 0,-0.381 ; DD3.3 0.25,-0.131 0,-0.381 ; DD3.5 0.932,2.045 3.81,2.045 ; ZL2.1 3.81,5.715 ; R4.2 3.664,6.985 3.81,6.839 3.81,5.715 ; 0,-0.381 0,-0.645 C13.1@0.063,-0.708 ; C13.1@0.062,-0.708 C13.1 C13.1@0.063,-0.708 ; C13.1@0.062,-0.708 2.944,-0.708 3.81,0.158 3.81,2.045 ; 3.81,2.045 3.81,5.715
NetC15_2: C15.2 C16.2 DA3.5 DA3.6 DA3.7 VD1.2 VT1.3 | length 30.6
  Top Layer w0.25: 4.318,26.035 6.04,26.035 6.58,26.575 ; v1(4.572,29.464) 4.649,29.541 5.588,29.541 ; C15.2 5.588,29.541 ; C16.2 5.588,29.541 ; DA3.6 6.62,26.615 6.58,26.575 ; DA3.5 6.62,29.541 5.588,29.541 ; DA3.7 7.12,26.721 6.974,26.575 6.58,26.575
  Top Layer w0.5: v1(-6.769,25.4) -6.694,25.474 -6.146,25.474 -5.715,25.905 VT1.3 ; VD1.2 3.195,24.13 4.025,24.13 4.318,24.423 4.318,26.035 4.318,29.102 4.572,29.356 v1(4.572,29.464)
  Bottom Layer w0.25: -4.445,26.035 -2.008,26.035 -1.068,25.095 2.132,25.095 4.572,27.535 4.572,28.781
  Bottom Layer w0.5: v1(-6.769,25.4) -6.134,26.035 -4.445,26.035 ; 4.572,28.781 v1(4.572,29.464)
NetC17_2: C17.2 DA3.8 | length 1.8
  Top Layer w0.25: C17.2 6.985,25.95 7.11,26.075 7.406,26.075 7.62,26.289 DA3.8
NetC18_1: C18.1 DD3.8 ZL2.2 | length 3.9
  Top Layer w0.25: DD3.8 0.75,4.414 ; 0.791,4.455 1.411,4.455 ; C18.1 2.03,4.455 1.411,4.455 ; ZL2.2 1.416,5.715 1.27,5.569 1.27,4.596 1.411,4.455
NetDA2_1: DA2.1 HL4.K | length 4.3
  Top Layer w0.25: DA2.1 -10.475,24.445 -9.74,23.71 HL4.K
NetDA2_5: DA2.5 R5.1 | length 1.7
  Top Layer w0.25: DA2.5 -10.475,29.615 -10.16,29.93 R5.1
NetDA3_2: DA3.2 L1.2 | length 3.3
  Top Layer w0.25: DA3.2 8.12,30.343 8.245,30.468
  Top Layer w0.5: 8.245,30.468 8.889,31.112 8.889,32.231 L1.2
NetDA3_4: DA3.4 L1.1 | length 3.3
  Top Layer w0.25: 6.995,30.468 7.12,30.343 DA3.4
  Top Layer w0.5: L1.1 6.351,32.231 6.351,31.112 6.995,30.468
NetDA3_10: DA3.10 R6.1 R7.2 | length 3.8
  Top Layer w0.25: R7.2 8.572,24.9 8.882,24.9 ; DA3.10 8.62,26.797 8.88,26.537 8.88,24.902 8.882,24.9 ; 8.89,24.892 8.882,24.9 ; R6.1 8.882,24.9
NetDD1_4: DD1.4 X7.1 | length 3.7
  Top Layer w0.25: X7.1 2.159,24.371 2.159,23.749 2.794,23.114 2.794,22.733 2.626,22.565 DD1.4
NetDD1_16: DD1.16 X6.1 | length 5
  Top Layer w0.25: DD1.16 0.975,19.093 1.121,18.947 4.342,18.947 X6.1
NetDD2_1: DD2.1 XP1.9 XP4.1 | length 32
  Top Layer w0.25: DD2.1 5.06,11.45 8.128,8.382 8.128,2.667 10.16,0.635
  Top Layer w0.5: 10.16,0.635 v1(10.795,0) XP4.1
  Bottom Layer w0.5: XP1.9@2.54,-3.81 8.255,-3.81 8.89,-3.175 8.89,-0.635 9.525,0 v1(10.795,0) XP4.1
NetDD2_3: DD2.3 XP6.1 | length 13.6
  Top Layer w0.25: DD2.3 6.35,12.45 ; 6.35,12.446 8.636,10.16 10.16,10.16
  Top Layer w0.5: 10.16,10.16 v1(10.795,10.16) XP6.1
  Bottom Layer w0.5: v1(10.795,10.16) XP6.1
NetDD2_4: DD2.4 XP7.1 | length 12.9
  Top Layer w0.25: DD2.4 5.838,12.95 6.096,13.208 8.128,13.208 8.636,12.7 10.16,12.7
  Top Layer w0.5: 10.16,12.7 v1(10.795,12.7) XP7.1
  Bottom Layer w0.5: v1(10.795,12.7) XP7.1
NetDD2_5: DD2.5 XP8.1 | length 13.4
  Top Layer w0.25: DD2.5 5.068,13.45 5.588,13.97 9.525,13.97 10.16,14.605
  Top Layer w0.5: 10.16,14.605 v1(10.795,15.24) XP8.1
  Bottom Layer w0.5: v1(10.795,15.24) XP8.1
NetDD2_12: DD2.12 XP20.1 | length 13.6
  Top Layer w0.25: -11.557,17.78 -10.795,17.018 -10.795,16.51 -9.144,14.859 -2.667,14.859 -2.286,15.24 -1.397,15.24 -1.25,15.093 DD2.12
  Top Layer w0.5: XP20.1 -11.557,17.78
NetDD2_13: DD2.13 XP19.1 | length 11.3
  Top Layer w0.25: -10.999,15.24 -9.709,13.95 DD2.13
  Top Layer w0.5: XP19.1 -10.999,15.24
NetDD2_14: DD2.14 XP18.1 | length 12.9
  Top Layer w0.25: -9.525,12.7 -7.499,12.7 -6.749,13.45 DD2.14
  Top Layer w0.5: XP18.1 v1(-10.795,12.7) -9.525,12.7
  Bottom Layer w0.5: XP18.1 v1(-10.795,12.7)
NetDD2_22: DD2.22 X1.1 | length 2.6
  Top Layer w0.25: DD2.22 0.25,8.843 0.635,8.458 v1(0.635,8.255)
NetDD2_24: DD2.24 XP1.7 XP25.1 | length 40.6
  Top Layer w0.25: DD2.24 1.25,9.926 1.524,9.652 2.159,9.652 2.921,10.414 4.826,10.414 7.239,8.001 7.239,2.032 10.123,-0.852 ; 4.222,-4.16 4.507,-4.445 10.16,-4.445
  Top Layer w0.5: v1(3.937,-2.54) 3.937,-3.875 4.222,-4.16 ; 10.123,-0.852 10.779,-1.508 10.779,-2.524 v1(10.795,-2.54) ; 10.16,-4.35 10.77,-3.74 10.77,-2.565 v1(10.795,-2.54) ; XP25.1 v1(10.795,-2.54)
  Bottom Layer w0.25: XP1.7@1.27,-4.445 XP1.7
  Bottom Layer w0.5: XP1.7 1.27,-1.563 1.563,-1.27 3.587,-1.27 3.88,-1.563 3.88,-2.483 v1(3.937,-2.54) ; v1(10.795,-2.54) XP25.1
NetDD3_4: DD3.4 X2.1 | length 3.1
  Top Layer w0.25: DD3.4 0.75,0.393 1.016,0.127 1.829,0.127 2.337,0.635 v1(2.54,0.635)
NetDD3_9: DD3.9 X3.1 | length 2.8
  Top Layer w0.25: DD3.9 0.238,3.733 0.238,5.829 0.635,6.225 v1(0.635,6.35)
NetDD3_10: DD3.10 X4.1 | length 3.1
  Top Layer w0.25: v1(-1.27,6.35) -1.126,6.206 -0.262,5.342 -0.262,4.632 -0.25,4.621 -0.25,4.414 DD3.10
NetDD3_11: DD3.11 X5.1 | length 3.9
  Top Layer w0.25: v1(-3.175,6.35) -1.905,5.08 -1.416,5.08 -0.75,4.414 DD3.11
NetHL1_A: HL1.A R12.1 | length 2.4
  Top Layer w0.25: HL1.A 9.8,23.35 10.795,24.345 R12.1
NetHL2_K: HL2.K R2.1 | length 2
  Top Layer w0.25: HL2.K@-8.255,17.145 HL2.K R2.1
NetHL3_K: HL3.K R3.1 | length 1.6
  Top Layer w0.25: HL3.K@-8.255,19.05 HL3.K ; -7.62,19.05 R3.1
NetHL4_A: HL4.A R1.1 | length 3.1
  Top Layer w0.25: HL4.A -8.02,22.205 -8.02,21.45 -6.89,20.32 R1.1
nReset: DD2.19 SB1.1 XP1.1 XP26.1 | length 33.4
  Top Layer w0.25: SB1.1@-9.52,-2.565 -9.525,-2.56 -9.525,0 -9.525,3.83 -9.52,3.835 -9.52,5.085 -4.445,10.16 -1.396,10.16 -1.25,10.306 DD2.19
  Top Layer w0.5: XP26.1 v1(-10.795,0) -9.525,0
  Bottom Layer w0.5: XP26.1 v1(-10.795,0) -8.89,0 -5.08,-3.81 XP1.1@-2.54,-3.81
SPI_MiSo: DD2.18 DD3.1 XP14.1 | length 30.7
  Top Layer w0.25: -10.795,3.81 -10.795,5.08 -4.425,11.45 DD2.18 ; v1@-3.81,-0.127 -3.683,0 -1.27,0 -0.75,0.52 DD3.1 ; v1(-3.81,0) v1@-3.81,0.089
  Top Layer w0.5: XP14.1 v1(-10.795,2.54) -10.795,3.81
  Bottom Layer w0.5: XP14.1 v1(-10.795,2.54) -7.747,2.54 -5.207,0 v1(-3.81,0) -3.175,0
SPI_MoSi: DD2.17 DD3.14 XP15.1 | length 27.8
  Top Layer w0.25: -11.684,5.08 -4.826,11.938 -4.572,11.938 ; -4.572,11.95 DD2.17 ; v1(-3.765,1.325) -3.64,1.449 -2.496,1.449 -1.905,2.04 DD3.14
  Top Layer w0.5: XP15.1 -11.684,5.08
  Bottom Layer w0.5: XP15.1 -9.017,5.08 -5.207,1.27 -3.819,1.27 v1(-3.765,1.325) -3.71,1.27 -3.175,1.27
SPI_nCS_IMU: DD2.15 DD3.12 XP17.1 | length 28
  Top Layer w0.25: -9.525,10.16 -8.519,10.16 -5.729,12.95 DD2.15 ; v1(-3.81,3.81) -2.704,3.81 -1.934,3.04 DD3.12
  Top Layer w0.5: XP17.1 v1(-10.795,10.16) -9.525,10.16
  Bottom Layer w0.5: XP17.1 v1(-10.795,10.16) -9.525,10.16 -6.858,7.493 -6.858,6.223 -4.476,3.841 -3.841,3.841 v1(-3.81,3.81) -3.175,3.81
SPI_SCLK: DD2.16 DD3.13 XP16.1 | length 27.9
  Top Layer w0.25: v1(-10.795,7.62) -10.16,7.62 -5.33,12.45 DD2.16 ; v1@-3.81,2.54 DD3.13
  Top Layer w0.5: XP16.1 v1(-10.795,7.62)
  Bottom Layer w0.5: XP16.1 v1(-10.795,7.62) -9.017,7.62 -7.747,6.35 -7.747,5.207 -5.411,2.871 -5.096,2.556 v1(-3.826,2.556) -3.81,2.54 -3.175,2.54
USB_N: DD1.7 XS1.2 | length 8.8
  Top Layer w0.25: DD1.7 -0.325,26.169 0,26.494 0,26.562 v1(0,26.67) 0.643,27.313 0.643,30.312 XS1.2
  Top Layer w0.5: -0.325,26.169 -0.325,26.237 v1@0,26.562 ; v1@0,26.494 0.643,27.137 0.643,27.313
USB_P: DD1.6 XS1.3 | length 11.5
  Top Layer w0.25: v1(-1.27,26.67) 0,27.94 XS1.3 ; DD1.6 0.325,25.09
  Top Layer w0.5: v1(-1.27,26.67) -1.27,26.744 -0.672,27.342 ; 0.325,25.09 0.325,25.361 1.253,26.289 v1(1.27,26.289)
  Bottom Layer w0.25: v1@-1.27,26.596 -0.394,25.72 0.847,25.72 1.27,26.143 v1(1.27,26.289)
  Bottom Layer w0.5: v1@-1.27,26.596 v1(-1.27,26.67)
V_bat: DA2.3 VT1.2 XP24.1 XP27.1 | length 20.2
  Top Layer w0.25: DA2.3 -8.575,26.584 -8.425,26.734 -7.736,26.734 -6.665,27.805 VT1.2
  Top Layer w0.5: VT1.2 -6.651,28.269 -6.651,29.435 -6.36,29.727 v1@-6.36,29.85 ; XP24.1 -6.355,31.11 -6.355,29.85 v1(-6.35,29.845)
  Bottom Layer w0.5: XP27.1 -12.243,28.397 -11.596,28.397 -11.303,28.689 -11.303,32.766 -10.668,33.401 -7.366,33.401 -6.35,32.385 -6.35,31.125 XP24.1 -6.355,31.11 -6.355,29.85 v1(-6.35,29.845)
pads on no net: DD1.5 DD1.11 DD1.12 DD1.14 HL1.0 HL2.0 HL3.0 HL4.0 VD1.0 XP1.3 XP1.4 XP1.5 XS1.4

## Polygon pours and split planes (outlines as drawn)
GND on Bottom Layer "GND_L02_P001" (solid, remove dead copper, pour order 1): -12.065,35 12.065,35 12.065,-5 -12.065,-5
GND on Top Layer "GND_L01_P000" (solid, remove dead copper, pour order 0): -12.065,35 12.065,35 12.065,-5 -12.065,-5

## Keep-outs
Keep-Out Layer:
  the board outline again, w0.2

## Other copper
Top Layer:
  pour cut-out: -10.16,31.496 -7.62,31.496 -7.62,25.654 -10.16,25.654
  pour cut-out: -4.699,24.765 -3.175,24.765 -3.175,20.955 -4.699,20.955
  pour cut-out: -12.7,24.765 -10.795,24.765 -10.795,23.495 -12.7,23.495
  pour cut-out: 6.985,27.305 8.89,27.305 8.89,25.273 6.985,25.273
  pour cut-out: 8.89,30.48 10.795,30.48 10.795,29.21 8.89,29.21
  pour cut-out: 0.635,3.81 1.905,3.81 1.905,1.905 0.635,1.905
  pour cut-out: -7.62,20.32 -4.699,20.32 -4.699,15.875 -7.62,15.875
  text "to" at -6.383,5.141 h3
Bottom Layer:
  text "SSS" at 2.129,17.587 h2.5
  text "'.ModifiedDate'" at -7.178,9.875 h2.5 r270
  text "bo" at 8.978,1.564 h3

## Silkscreen, mask and mechanical layers (free items; w line width, h text height)
Top Overlay:
  lines w0.15: -11.43,17.145 -10.795,17.145 ; -11.43,19.05 -10.795,19.05 ; -10.795,12.7 -11.43,12.7 -11.43,22.225 -10.795,22.225 ; -10.795,13.97 -11.43,13.97 -11.43,15.24 -10.795,15.24 ; 7.62,20.955 8.89,22.225
  text "3.3V" at 5.563,19.846 h1.5
  text "Charge" at -11.029,14.893 h1.5
  text "A8" at -9.681,13.496 h1.5
  text "A14" at -10.051,12.218 h1.5
  text "Res" at -8.734,3.973 h1.5
  text "A0" at 6.831,3.971 h1.5
Bottom Overlay:
  text "5V" at -8.255,30.008 h1.5
  text "3.3V" at 10.795,30.006 h1.5
  text "Bat" at -8.255,27.468 h1.5
  text "3.3V" at 10.795,27.466 h1.5
  text "Gnd" at -8.255,24.92 h1.5
  text "Gnd" at 10.795,24.92 h1.5
  text "A8" at -8.255,22.386 h1.5
  text "Gnd" at 10.795,22.38 h1.5
  text "A14" at -8.255,19.838 h1.5
  text "A5" at 10.795,19.848 h1.5
  text "A15" at -8.255,17.306 h1.5
  text "A4" at 10.795,17.3 h1.5
  text "A16" at -8.255,14.766 h1.5
  text "A3" at 10.795,14.766 h1.5
  text "A17" at -8.255,12.218 h1.5
  text "A2" at 10.461,12.218 h1.5
  text "A0" at 4.118,10.956 h1.5
  text "A18" at -8.255,9.686 h1.5
  text "A1" at 10.285,9.678 h1.5
  text "A19" at -8.255,7.146 h1.5
  text "Gnd" at 10.795,7.14 h1.5
  text "A22" at -8.255,4.598 h1.5
  text "3.3V" at 10.795,4.606 h1.5
  text "A23" at -8.255,2.066 h1.5
  text "A0" at 10.16,2.066 h1.5
  text "Res" at -8.255,-0.472 h1.5
  text "A31" at 10.16,-0.474 h1.5
  text "Gnd" at -8.255,-3.02 h1.5
  text "A30" at 10.795,-3.014 h1.5
Dimensions:
  lines w0.1: -12.7,12.7 0,12.7 12.7,12.7 ; 0,-5 0,33
Mechanical 3:
  lines w0.1: -11.5,32.5 -11.5,-5 11.5,-5 11.5,32.5 ; -11.5,33.77 11.5,33.77

## Text inside footprints (layer, text, board x,y; h text height)
DD3: Top Overlay "*" at -0.365,0.089 h1.5 r90; Mechanical 13 "*" at -0.365,1.359 h1.5 r90